# EAGLE board 2015Xover (EAGLE 7.6.0)
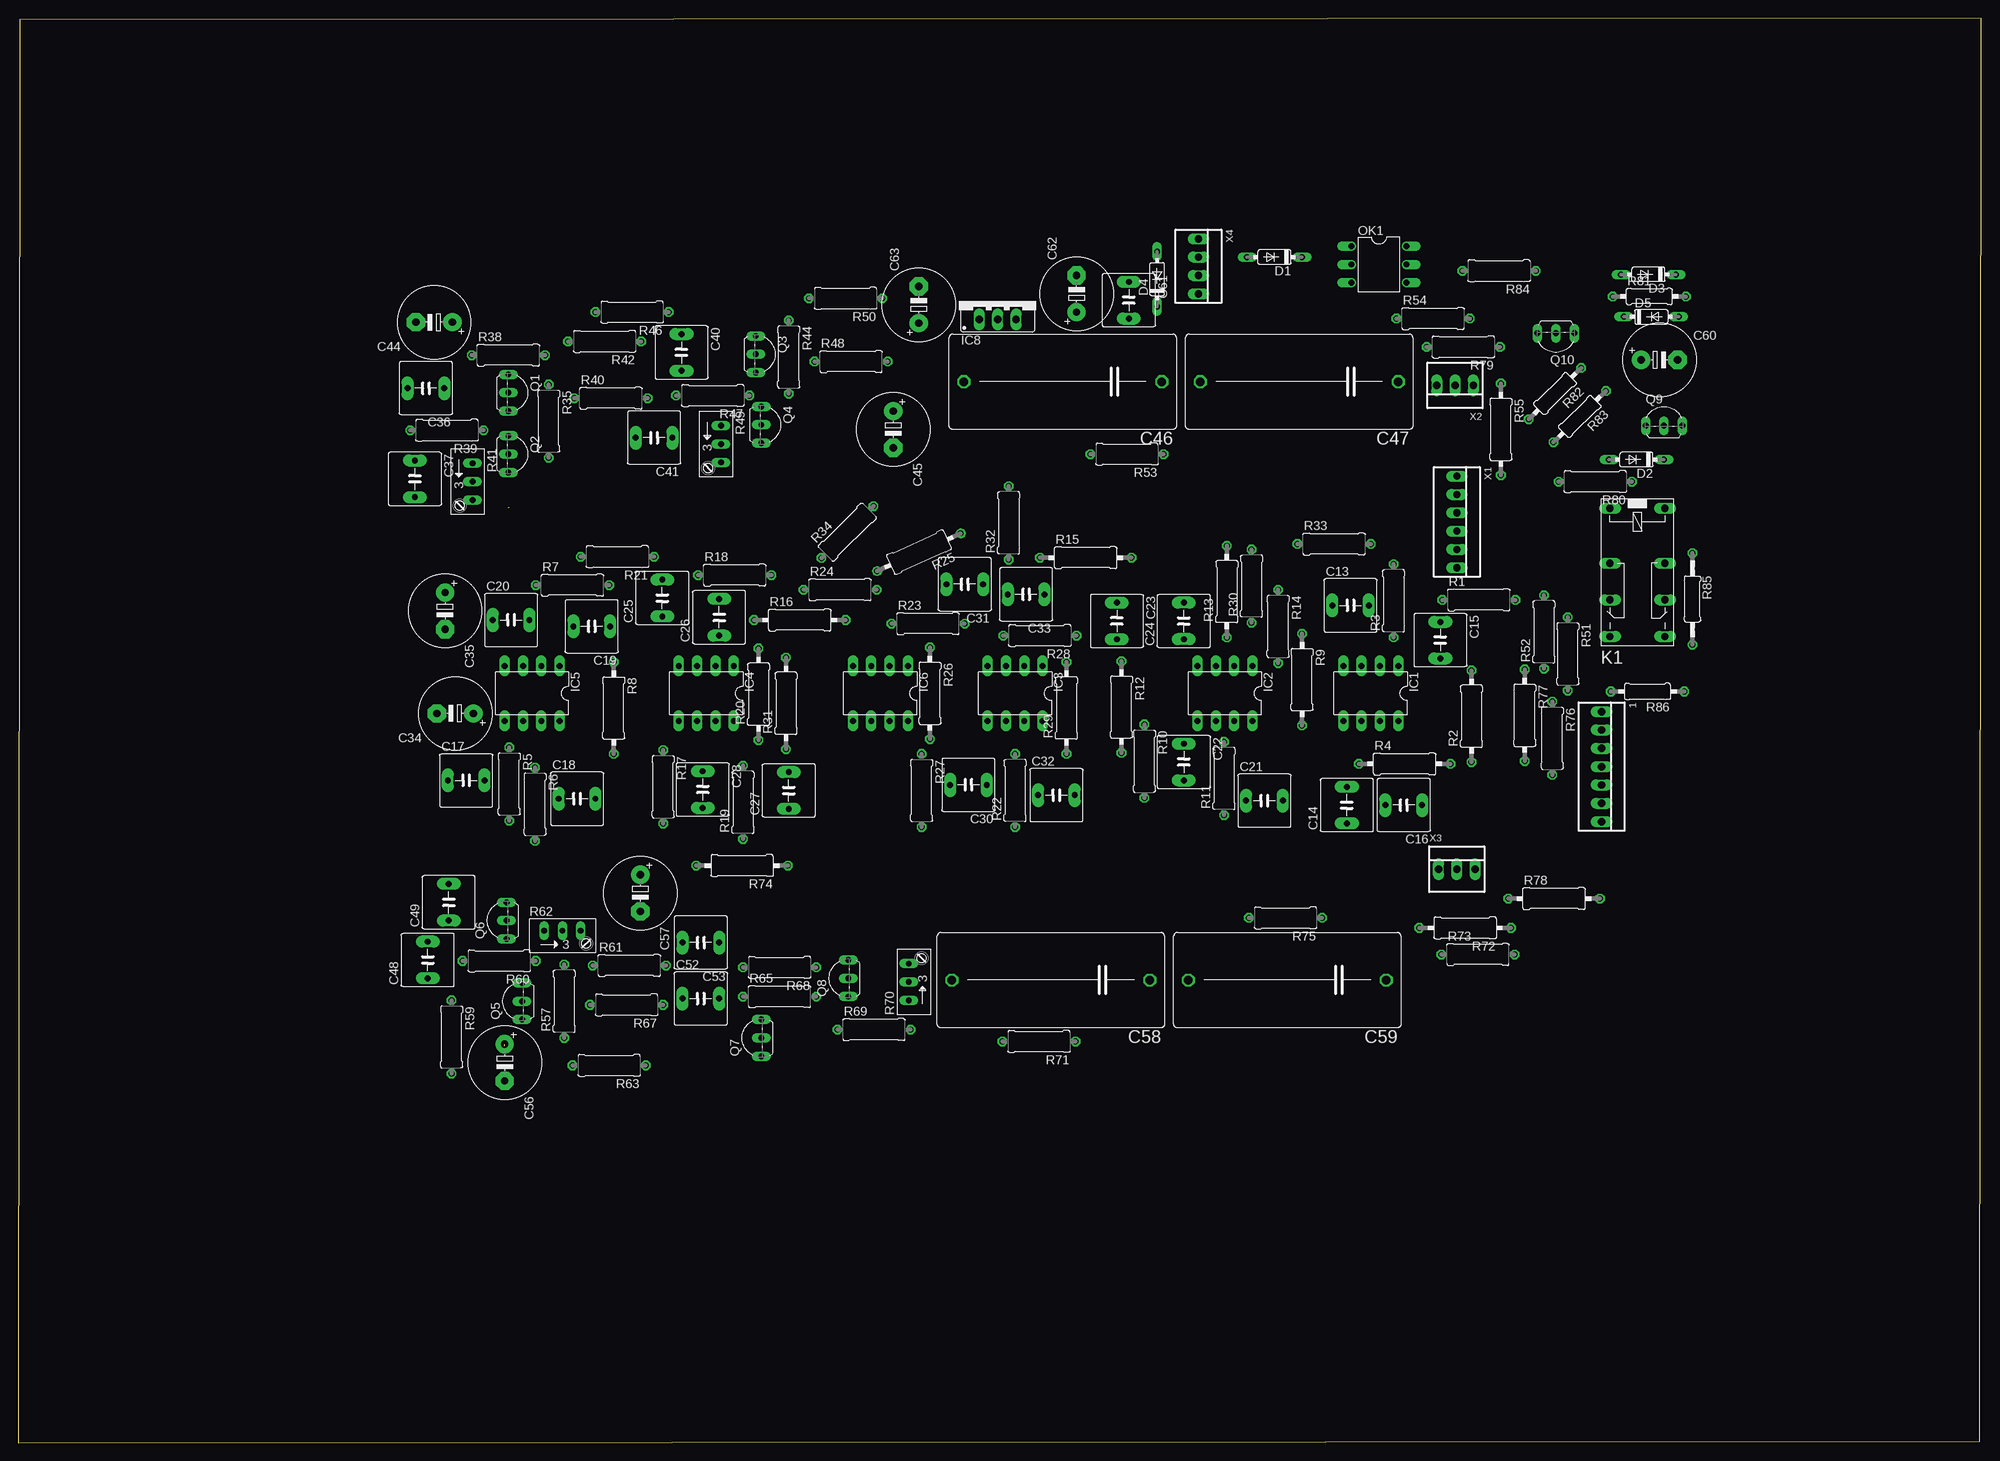
[diagram p0: board, top side]
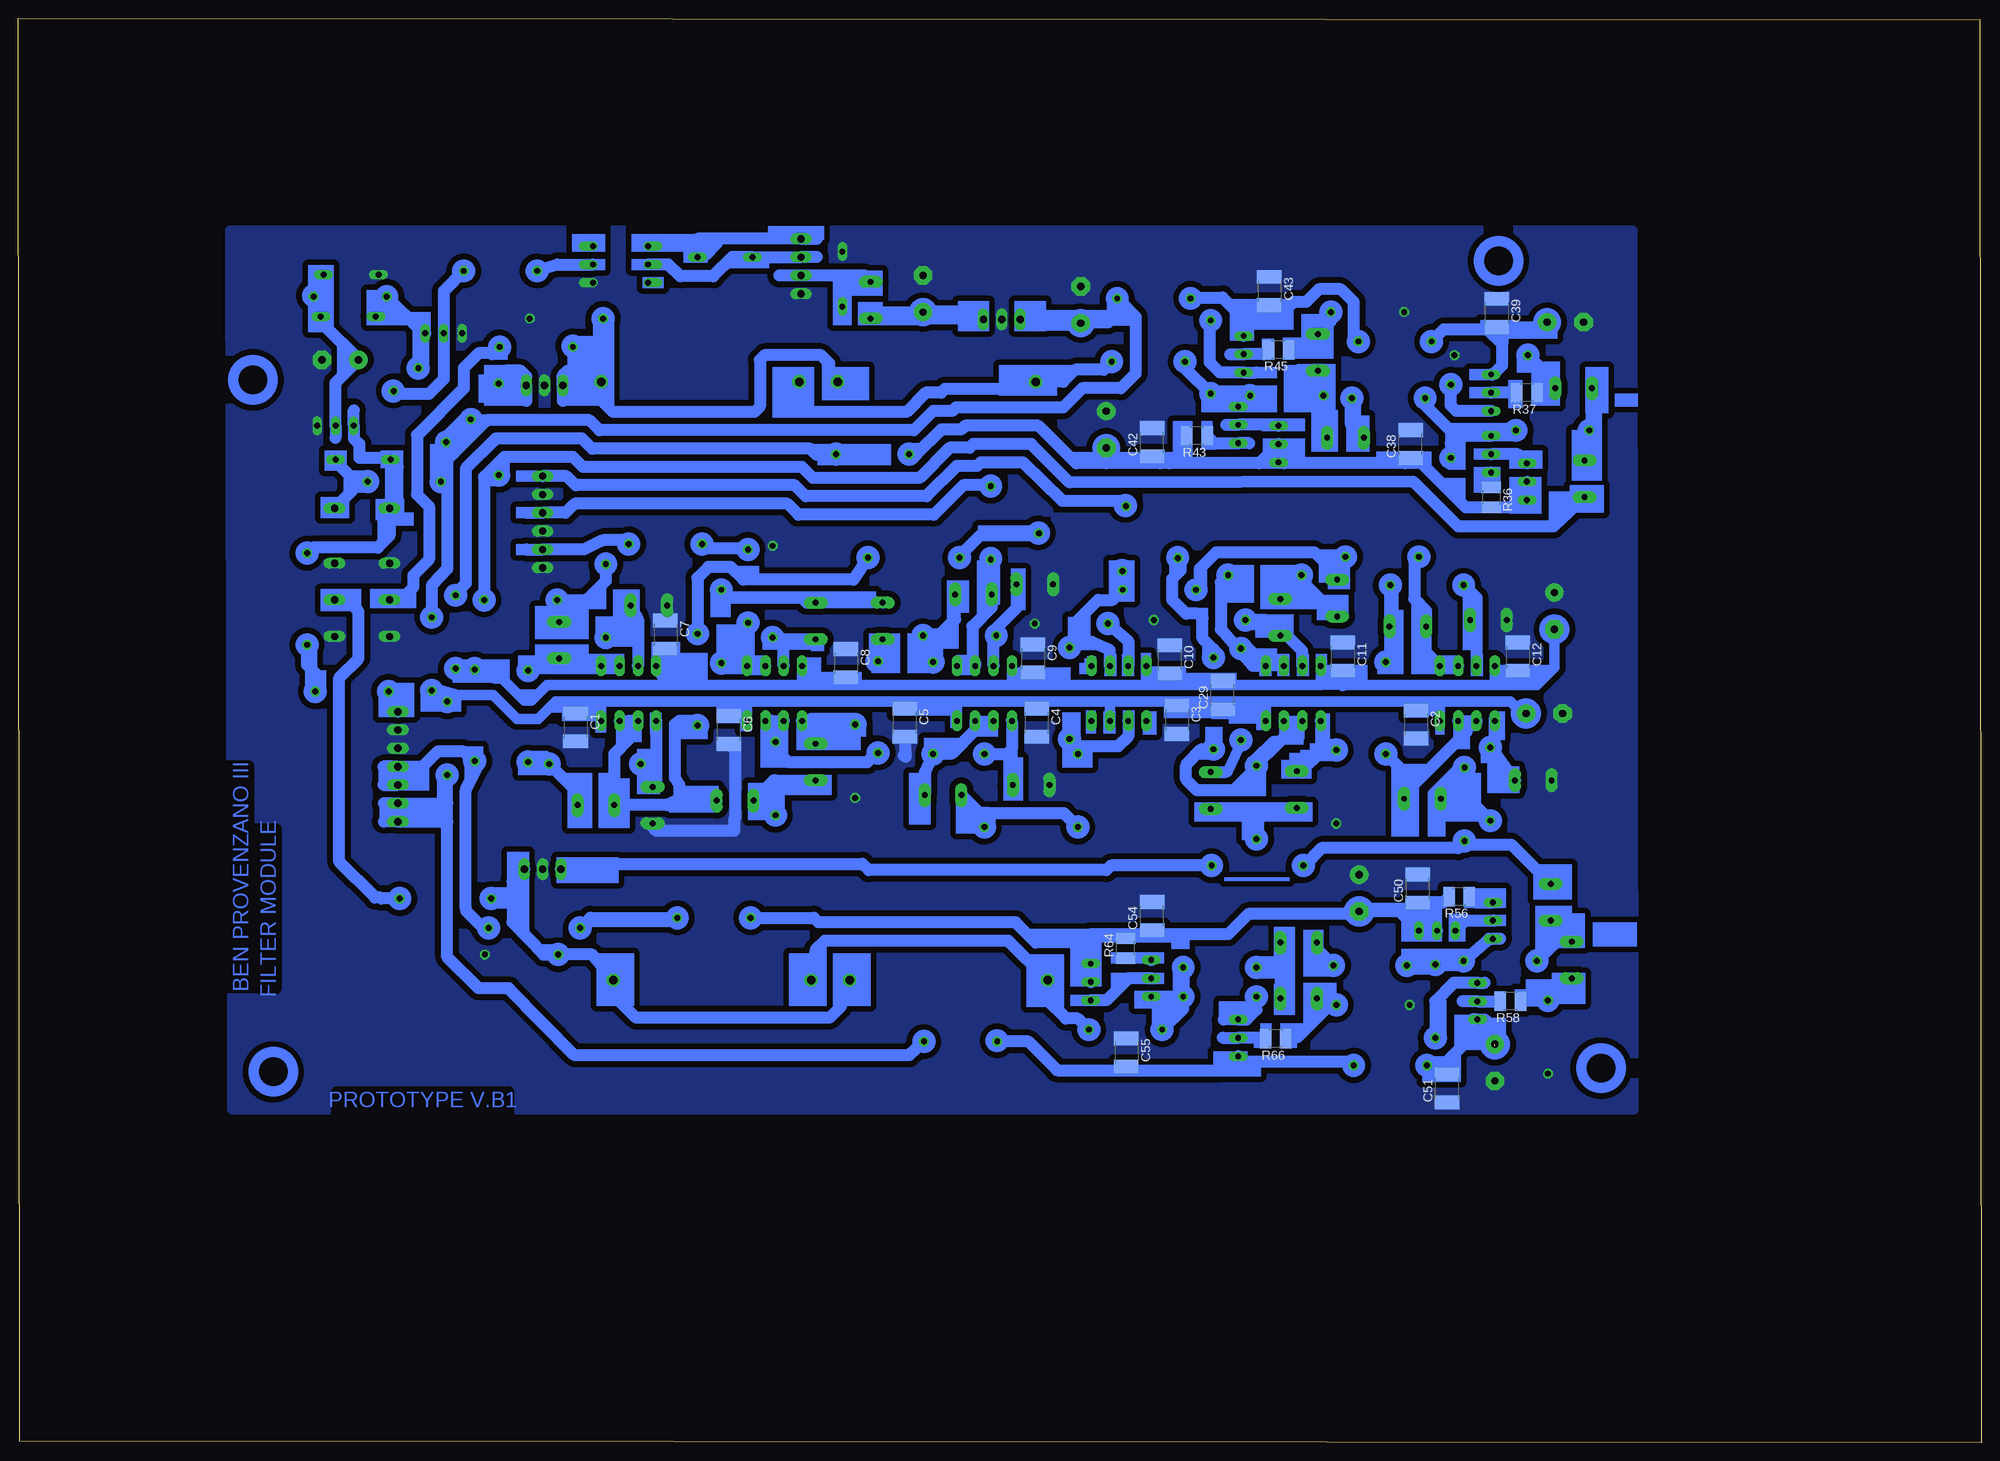
[diagram p1: board, bottom side, seen from below]

Size 272.08 x 197.47 mm. Coordinates in mm from the lower left corner, seen from the top.
Outline: 0,0 271.83,0.25 272.08,197.47 0.25,197.22 0,0
Copper layers (1*16): Top 0.035mm / dielectric 1.5mm / Bottom 0.035mm
Design rules "default": minimum track width 10mil, minimum drill 24mil, track to track 8mil, track to pad 8mil, pad to pad 8mil, via to via 8mil, smd to smd 8mil, copper to edge 40mil, drill to drill 8mil, minimum pad ring 10mil, minimum via ring 8mil, stop-mask expansion 5mil, vias tented up to drill 0mil, thermal gap 10mil

## Footprints (pad centres in the part's own frame; a part is rotated, then mirrored left to right if it is on the bottom)
22-23-2071 = drill 1 long: 1 -7.62,0; 2 -5.08,0; 3 -2.54,0; 4 0,0; 5 2.54,0; 6 5.08,0; 7 7.62,0
C4532 = smd 1.9 x 3.4: 1 -1.95,0; 2 1.95,0
C050-075X075 = drill 0.813 pad 1.676 long: 1 -2.54,0; 2 2.54,0
E5-10,5 = drill 1.016 pad 2.54: + -2.54,0 | drill 1.016 pad 2.54 octagon: - 2.54,0
C275-134X316 = drill 1.194 octagon: 1 -13.716,0; 2 13.716,0
DO35-7 = drill 0.813 long: A 3.81,0; C -3.81,0
DIL08 = drill 0.813 pad 1.422 long: 1 -3.81,-3.81; 2 -1.27,-3.81; 3 1.27,-3.81; 4 3.81,-3.81; 5 3.81,3.81; 6 1.27,3.81; 7 -1.27,3.81; 8 -3.81,3.81
78XXS = drill 1.016 long: GND 0,-2.54; IN -2.54,-2.54; OUT 2.54,-2.54
351 = drill 1.016 long: 1 -3.81,-3.81; 16 -3.81,3.81; O1 8.89,-3.81; O2 8.89,3.81; P1 3.81,-3.81; P2 3.81,3.81; S1 13.97,-3.81; S2 13.97,3.81
DIL06 = drill 0.813 offset: 1 -2.54,-3.81; 2 0,-3.81; 3 2.54,-3.81; 4 2.54,3.81; 5 0,3.81; 6 -2.54,3.81
TO92-EBC = drill 0.813 long: B 0,-1.27; C -2.54,-1.27; E 2.54,-1.27
0309/10 = drill 0.813 octagon: 1 -5.08,0; 2 5.08,0
0309/12 = drill 0.813 octagon: 1 -6.35,0; 2 6.35,0
R1210 = smd 1.6 x 2.7: 1 -1.4,0; 2 1.4,0
RJ9W = drill 0.813 long: A 2.54,0.635; E -2.54,0.635; S 0,0.635
0207/10 = drill 0.813 octagon: 1 -5.08,0; 2 5.08,0
0207/12 = drill 0.813 octagon: 1 -6.35,0; 2 6.35,0
22-23-2061 = drill 1 long: 1 -6.35,0; 2 -3.81,0; 3 -1.27,0; 4 1.27,0; 5 3.81,0; 6 6.35,0
22-23-2031 = drill 1 long: 1 -2.54,0; 2 0,0; 3 2.54,0
22-23-2041 = drill 1 long: 1 -3.81,0; 2 -1.27,0; 3 1.27,0; 4 3.81,0

## Placement (x,y rotation side)
1  PWR  [22-23-2071]  219.46,93.73 270 top
C1  .1  [C4532]  194.82,99.19 270 bottom
C2  .1  [C4532]  78.36,99.57 270 bottom
C3  .1  [C4532]  111.51,100.2 270 bottom
C4  .1  [C4532]  130.94,99.82 270 bottom
C5  .1  [C4532]  149.22,99.82 270 bottom
C6  .1  [C4532]  173.61,98.81 270 bottom
C7  .1  [C4532]  182.37,112.01 270 bottom
C8  .1  [C4532]  157.35,108.08 270 bottom
C9  .1  [C4532]  131.44,108.71 270 bottom
C10  .1  [C4532]  112.52,108.58 270 bottom
C11  .1  [C4532]  88.52,108.97 270 bottom
C12  .1  [C4532]  64.26,108.97 270 bottom
C13  33nF  [C050-075X075]  184.66,116.08 0 top
C14  33nF  [C050-075X075]  184.15,88.39 90 top
C15  2x33nF  [C050-075X075]  197.1,111.25 270 top
C16  2x33nF  [C050-075X075]  192.02,88.39 180 top
C17  33nF  [C050-075X075]  62.1,91.82 0 top
C18  2x33nF  [C050-075X075]  77.47,89.28 0 top
C19  2x33nF  [C050-075X075]  79.5,113.16 180 top
C20  33nF  [C050-075X075]  68.33,114.05 0 top
C21  100nF  [C050-075X075]  172.72,89.03 0 top
C22  100nF  [C050-075X075]  161.54,94.36 270 top
C23  100nF  [C050-075X075]  152.27,113.92 270 top
C24  100nF  [C050-075X075]  161.54,113.92 90 top
C25  100nF  [C050-075X075]  89.28,117.09 90 top
C26  100nF  [C050-075X075]  97.16,114.43 90 top
C27  100nF  [C050-075X075]  106.81,90.42 90 top
C28  100nF  [C050-075X075]  94.87,90.55 270 top
C29  .1  [C4532]  105.16,103.63 90 bottom
C30  100nF  [C050-075X075]  131.7,91.19 180 top
C31  100nF  [C050-075X075]  131.19,119 180 top
C32  2x100nF  [C050-075X075]  143.89,89.79 0 top
C33  2x100nF  [C050-075X075]  139.7,117.6 180 top
C34  100uF  [E5-10,5]  60.58,101.09 180 top
C35  100uF  [E5-10,5]  59.18,115.32 270 top
C36  33nF  [C050-075X075]  56.52,146.18 180 top
C37  33nF  [C050-075X075]  54.99,133.6 270 top
C38  .1  [C4532]  79.12,138.43 90 bottom
C39  .1  [C4532]  67.18,156.59 270 bottom
C40  33nF  [C050-075X075]  91.95,151.13 270 top
C41  33nF  [C050-075X075]  88.14,139.32 180 top
C42  .1  [C4532]  114.94,138.68 90 bottom
C43  .1  [C4532]  98.68,159.64 270 bottom
C44  100uF  [E5-10,5]  57.66,155.32 180 top
C45  100uF  [E5-10,5]  121.28,140.46 270 top
C46  3u3  [C275-134X316]  144.78,147.07 180 top
C47  1uF  [C275-134X316]  177.55,147.07 180 top
C48  33nF  [C050-075X075]  56.77,66.93 90 top
C49  33nF  [C050-075X075]  59.69,74.93 90 top
C50  .1  [C4532]  78.11,76.84 90 bottom
C51  .1  [C4532]  74.04,49.15 90 bottom
C52  33nF  [C050-075X075]  94.62,61.59 0 top
C53  33nF  [C050-075X075]  94.62,69.34 180 top
C54  .1  [C4532]  114.94,73.03 90 bottom
C55  .1  [C4532]  118.49,54.1 270 bottom
C56  100uF  [E5-10,5]  67.44,52.7 270 top
C57  100uF  [E5-10,5]  86.23,76.2 270 top
C58  3u3  [C275-134X316]  143.13,64.13 180 top
C59  1uF  [C275-134X316]  175.89,64.13 180 top
C60  100uF  [E5-10,5]  227.46,150.11 0 top
C61  .5APTC  [C050-075X075]  153.92,158.37 270 top
C62  100uF  [E5-10,5]  146.69,159.26 90 top
C63  47uF  [E5-10,5]  124.84,157.73 90 top
D1  4148  [DO35-7]  174.12,164.34 180 top
D2  4007  [DO35-7]  224.28,136.27 180 top
D3  15v  [DO35-7]  225.93,161.93 180 top
D4  15V  [DO35-7]  157.86,161.29 90 top
D5  4148  [DO35-7]  226.31,156.08 0 top
IC1  OPA2134P  [DIL08]  187.45,103.89 180 top
IC2  OPA2134P  [DIL08]  167.26,103.89 180 top
IC3  OPA2134P  [DIL08]  138.18,103.89 180 top
IC4  OPA2134P  [DIL08]  95.38,103.89 180 top
IC5  OPA2134P  [DIL08]  71.25,103.89 180 top
IC6  OPA134S  [DIL08]  119.51,103.89 180 top
IC8  [78XXS]  135.76,158.24 0 top
K1  351  [351]  224.41,125.73 270 top
OK1  4N28  [DIL06]  188.59,163.32 270 top
Q1  K170  [TO92-EBC]  69.22,145.54 270 top
Q2  J112  [TO92-EBC]  69.22,137.03 270 top
Q3  K170  [TO92-EBC]  103.5,150.88 270 top
Q4  J112  [TO92-EBC]  104.27,141.1 270 top
Q5  K170  [TO92-EBC]  68.58,61.21 90 top
Q6  J112  [TO92-EBC]  66.42,72.39 90 top
Q7  K170  [TO92-EBC]  101.73,56.13 90 top
Q8  J112  [TO92-EBC]  113.79,64.39 90 top
Q9  2106  [TO92-EBC]  228.09,142.24 0 top
Q10  BC546  [TO92-EBC]  213.11,152.53 180 top
R1  15K  [0309/10]  202.44,116.84 0 top
R2  15k  [0309/12]  201.42,100.71 90 top
R3  15k  [0309/10]  190.63,116.71 90 top
R4  15k  [0309/12]  192.15,94.11 0 top
R5  15k  [0309/10]  68.07,91.31 270 top
R6  15k  [0309/10]  71.63,88.52 270 top
R7  15k  [0309/10]  76.83,118.87 0 top
R8  15k  [0309/12]  82.55,101.85 270 top
R9  0  [0309/12]  177.93,105.79 270 top
R10  50K  [0309/10]  156.08,94.49 270 top
R11  25K  [0309/10]  167.13,92.07 90 top
R12  0  [0309/12]  152.91,101.98 270 top
R13  50K  [0309/12]  167.51,117.98 90 top
R14  25K  [0309/10]  174.62,113.16 270 top
R15  0  [0309/12]  147.95,122.68 0 top
R16  50K  [0309/12]  108.33,114.05 0 top
R17  50K  [0309/10]  89.41,90.93 270 top
R18  25K  [0309/10]  99.31,120.27 0 top
R19  25K  [0309/10]  100.46,88.77 90 top
R20  0  [0309/12]  102.62,103.76 90 top
R21  0  [0309/10]  83.06,122.81 180 top
R22  25K  [0309/10]  138.18,90.42 90 top
R23  1K  [0309/10]  126.11,113.54 0 top
R24  10K  [0309/10]  113.92,118.24 0 top
R25  10K  [0309/12]  124.84,123.44 204.3 top
R26  10K  [0309/12]  126.36,103.89 270 top
R27  25K  [0309/10]  125.22,90.42 270 top
R28  25K  [0309/10]  141.61,111.89 180 top
R29  25K  [0309/12]  145.29,101.85 90 top
R30  118  [0309/10]  170.94,118.75 90 top
R31  118  [0309/12]  106.43,102.49 90 top
R32  118  [0309/10]  137.29,127.51 90 top
R33  NA  [0309/10]  182.37,124.59 0 top
R34  NA  [0309/10]  114.94,126.24 45 top
R35  5R1  [0309/10]  73.53,141.61 270 top
R36  1K1  [R1210]  67.94,131.06 270 bottom
R37  1K1  [R1210]  62.99,145.54 180 bottom
R38  30K  [0309/10]  67.94,150.75 0 top
R39  15k  [0309/10]  59.44,140.33 180 top
R40  118  [0309/10]  82.17,144.78 0 top
R41  [RJ9W]  62.36,133.22 270 top
R42  0  [0309/10]  81.28,152.65 180 top
R43  1K1  [R1210]  108.71,139.57 180 bottom
R44  5R1  [0309/10]  106.81,150.5 270 top
R45  1K1  [R1210]  97.41,151.51 180 bottom
R46  30K  [0309/10]  85.09,156.72 180 top
R47  15k  [0309/10]  96.27,145.16 180 top
R48  118  [0309/10]  115.44,149.86 0 top
R49  [RJ9W]  96.77,138.43 270 top
R50  5R1  [0309/10]  114.68,158.62 180 top
R51  0  [0309/10]  214.76,109.35 270 top
R52  0  [0309/10]  211.45,112.39 90 top
R53  5R1  [0309/10]  153.67,137.03 180 top
R54  100K  [0309/10]  196.09,155.83 0 top
R55  NA  [0309/12]  205.49,140.46 270 top
R56  1K1  [R1210]  72.39,75.69 180 bottom
R57  5R1  [0309/10]  75.69,61.21 90 top
R58  1K1  [R1210]  65.28,61.21 180 bottom
R59  30K  [0309/10]  60.07,56.26 270 top
R60  15k  [0309/10]  66.67,66.8 180 top
R61  118  [0309/10]  84.71,66.17 0 top
R62  [RJ9W]  75.44,70.36 0 top
R63  0  [0309/10]  81.91,52.32 180 top
R64  1K1  [R1210]  118.62,68.58 90 bottom
R65  5R1  [0309/10]  105.54,61.85 0 top
R66  1K1  [R1210]  97.79,56.01 180 bottom
R67  30K  [0309/10]  84.33,60.71 180 top
R68  15k  [0309/10]  105.54,65.91 180 top
R69  118  [0309/10]  118.62,57.28 0 top
R70  [RJ9W]  124.08,63.88 90 top
R71  5R1  [0309/10]  141.48,55.63 180 top
R72  0  [0309/12]  200.53,71.37 180 top
R73  100K  [0309/10]  202.31,67.69 0 top
R74  NA  [0309/12]  100.33,80.01 180 top
R75  5R1  [0309/10]  175.64,72.77 180 top
R76  0V+  [0309/10]  212.6,97.66 270 top
R77  0V-  [0309/12]  208.79,100.84 270 top
R78  0  [0309/12]  212.85,75.44 0 top
R79  0  [0309/10]  200.28,151.89 180 top
R80  220  [0309/10]  218.57,133.22 180 top
R81  2M2  [0207/10]  226.06,158.88 0 top
R82  10K  [0207/10]  212.98,145.41 224.4 top
R83  10K  [0207/10]  216.41,142.24 224.3 top
R84  0  [0309/10]  205.23,162.43 180 top
R85  0  [0207/12]  232.03,116.97 270 top
R86  0  [0207/10]  225.81,104.14 180 top
X1  LPF  [22-23-2061]  199.39,127.63 270 top
X2  IO  [22-23-2031]  199.14,146.56 180 top
X3  IO  [22-23-2031]  199.39,79.5 0 top
X4  KK  [22-23-2041]  163.58,163.07 270 top

## Library data of the parts
1 = con-molex; MF: MOLEX; MPN: 22-23-2071; OC_FARNELL: 1654534; OC_NEWARK: 56H0445
C1-C63 R1-R40 R42-R48 R50-R61 R63-R69 R71-R86 = resistor
D1-D5 = diode
IC1-IC6 = linear
IC8 = v-reg
K1 = relay; OC_FARNELL: unknown; OC_NEWARK: unknown
OK1 = optocoupler; MF: FAIRCHILD SEMICONDUCTOR; MPN: 4N35; OC_FARNELL: 1328375; OC_NEWARK: 72K9946
Q1-Q10 = transistor-npn
R41 R49 R62 R70 = pot
X1 = con-molex; MF: MOLEX; MPN: 22-23-2061; OC_FARNELL: 1462922; OC_NEWARK: 27C1933
X2 X3 = con-molex; MF: MOLEX; MPN: 22-23-2031; OC_FARNELL: 1462950; OC_NEWARK: 30C0862
X4 = con-molex; MF: MOLEX; MPN: 22-23-2041; OC_FARNELL: 1462920; OC_NEWARK: 38C0355

## Nets
+15V: C1.1 C2.1 C3.1 C4.1 C5.1 C6.1 C29.1 C34.+ IC1.8 IC2.8 IC3.8 IC4.8 IC5.8 IC6.7 R51.2 R76.1
-15V: C7.2 C8.2 C9.2 C10.2 C11.2 C12.2 C29.2 C35.- IC1.4 IC2.4 IC3.4 IC4.4 IC5.4 IC6.4 R52.1 R77.1
GND: 1.2 1.3 C1.2 C2.2 C3.2 C4.2 C5.2 C6.2 C7.1 C8.1 C9.1 C10.1 C11.1 C12.1 C13.1 C14.1 C17.1 C20.1 C30.2 C31.2 C34.- C35.+ C38.2 C39.1 C42.2 C43.1 C44.- C45.+ C50.2 C51.1 C54.2 C55.1 C56.- C57.+ C60.- C62.- C63.- D3.A D4.A IC8.GND K1.P1 K1.P2 K1.S1 K1.S2 OK1.4 Q9.E Q10.E R10.2 R13.2 R16.2 R17.2 R23.2 R38.2 R46.2 R54.2 R59.2 R67.2 R73.2 X1.2 X1.4 X1.6 X2.2 X3.2 X4.4
N$1: C15.2 IC1.1 IC1.2 R2.2
N$2: C23.1 C24.2 R14.1
N$3: IC2.1 IC2.2 R14.2 R30.1
N$4: IC2.6 IC2.7 R11.2 R12.2
N$5: C33.2 IC3.1 IC3.2 R32.1
N$6: C32.2 IC3.6 IC3.7 R29.1
N$7: Q2.E R36.1
N$8: IC4.6 IC4.7 R19.2 R31.1
N$9: C18.2 IC5.6 IC5.7 R8.2
N$10: C19.2 IC5.1 IC5.2 R21.2
N$11: C16.1 R2.1 R4.2
N$12: C15.1 R1.1 R3.2
N$13: C13.2 IC1.3 R3.1
N$14: C14.2 IC1.5 R4.1
N$16: C18.1 R5.2 R6.1
N$17: C17.2 IC5.5 R5.1
N$18: C20.2 IC5.3 R7.1
N$19: C19.1 R7.2 R8.1
N$20: C21.1 C22.2 R11.1
N$21: C22.1 IC2.5 R10.1
N$22: C16.2 C21.2 IC1.6 IC1.7 R9.2
N$23: C24.1 IC2.3 R13.1
N$24: C23.2 R12.1
N$25: R9.1 R15.2
N$26: C27.2 R20.1
N$27: C27.1 C28.2 R19.1
N$28: C28.1 IC4.5 R17.1
N$29: C26.1 IC4.3 R16.1
N$30: C25.1 C26.2 R18.1
N$31: R30.2 R33.1
N$32: R31.2 R34.1
N$33: Q2.C R35.2 R39.1 R40.1
N$34: IC4.1 IC4.2 R18.2 R20.2
N$35: Q1.E R35.1
N$36: C49.2 R6.2 R74.2
N$37: C39.2 C44.+ Q1.C R42.2
N$38: IC6.2 R24.2 R25.2 R26.1
N$39: IC6.6 R26.2 R27.1
N$40: C25.2 R21.1 R24.1
N$41: R15.1 R25.1
N$42: Q1.B R37.2
N$43: C31.1 IC3.3 R28.2
N$44: C30.1 IC3.5 R22.2
N$45: C32.1 R22.1 R27.2
N$46: C33.1 R28.1 R29.2
N$47: Q2.B R41.E
N$48: C36.1 R37.1 R38.1
N$49: R34.2 X1.1
N$50: R32.2 X1.3
N$51: R33.2 X1.5
N$52: C36.2 C37.1 R39.2
N$53: C37.2 R1.2 R55.2
N$54: C41.2 R40.2
N$55: IC6.3 R23.1
N$56: C38.1 C42.1 C45.- R36.2 R41.A R41.S R43.2 R49.A R49.S R53.2
N$57: Q4.E R43.1
N$58: Q4.C R44.2 R47.1 R48.1
N$59: Q3.E R44.1
N$60: C43.2 Q3.C R42.1 R50.2
N$61: Q3.B R45.2
N$62: Q4.B R49.E
N$63: C40.1 R45.1 R46.1
N$64: C40.2 C41.1 R47.2
N$65: R52.2 R53.1
N$66: OK1.5 R84.2
N$67: C46.2 C47.2 R48.2
N$68: C46.1 C47.1 R54.1 R79.2 X2.3
N$69: R55.1 X2.1
N$70: 1.6 1.7 R71.1 R76.2
N$71: Q6.E R56.1
N$72: Q6.C R57.2 R60.1 R61.1
N$73: Q5.E R57.1
N$74: C51.2 C56.+ Q5.C R63.2
N$75: Q5.B R58.2
N$76: Q6.B R62.E
N$77: C48.1 R58.1 R59.1
N$78: C48.2 C49.1 R60.2
N$79: C50.1 C54.1 C57.- R56.2 R62.A R62.S R64.2 R70.A R70.S R75.2
N$80: C53.2 R61.2
N$81: Q8.E R64.1
N$82: Q8.C R65.2 R68.1 R69.1
N$83: Q7.E R65.1
N$84: C55.2 Q7.C R63.1 R71.2
N$85: Q7.B R66.2
N$86: Q8.B R70.E
N$87: C52.1 R66.1 R67.1
N$88: C52.2 C53.1 R68.2
N$89: D1.C OK1.1 X4.1
N$90: R72.2 R75.1
N$91: C58.2 C59.2 R69.2
N$92: C58.1 C59.1 R73.1 R78.1 X3.3
N$93: R74.1 X3.1
N$94: 1.4 1.5 R72.1 R77.2
N$95: D1.A OK1.2 X4.2
N$96: K1.O1 R79.1
N$97: D2.C K1.16 R80.1
N$98: C60.+ D3.C D5.A Q9.B R81.2
N$99: K1.O2 R78.2
N$100: D2.A K1.1 Q9.C R85.1
N$101: C61.1 D4.C X4.3
N$102: C61.2 C62.+ IC8.OUT
N$103: D5.C Q10.C R81.1 R82.1
N$104: Q10.B R83.1 R84.1
N$105: C63.+ IC8.IN R50.1 R51.1 R80.2 R82.2 R83.2
N$106: R85.2 R86.1
N$107: 1.1 R86.2

## Tracks (layer width: path | path; a pad name or v marks a point on that pad's centre or on a via)
+15V
  Bottom 1.422: IC5.8 75.06,102.74 | 78.11,102.74 99.19,102.74 | 106.81,102.74 120.78,102.74 | 120.78,102.74 130.94,102.74 | 130.94,102.74 141.99,102.74 | 141.99,102.74 145.67,102.74 | 145.67,102.74 171.07,102.74 | 171.07,102.74 173.61,102.74 | 191.26,102.74 IC1.8 | IC4.8 99.19,102.74 | IC6.7 120.78,102.74 | IC3.8 141.99,102.74 | IC2.8 171.07,102.74 | C6.1 173.61,102.74 | C5.1 144.65,102.62 145.67,102.74 | 194.18,101.73 192.66,102.74 | 192.66,102.74 192.53,102.74 | 192.53,102.74 191.26,102.74 | C4.1 130.94,102.74 | C2.1 78.11,102.74 | C3.1 111.63,102.5 106.81,102.74 | 106.81,102.74 99.19,102.74 | 173.61,102.74 191.26,102.74 | 192.53,102.74 194.18,101.85 194.18,101.73 | 194.18,101.73 C1.1 | 192.66,102.74 197.61,102.74 200.02,100.33 202.95,100.33 206.25,103.63 211.2,103.63 212.59,104.04 | 78.11,102.74 75.06,102.74 | 75.06,102.74 65.28,102.74 63.63,101.09 C34.+ | 212.59,104.04 213.36,104.27 R51.2 | R76.1 212.59,104.04
  Bottom 1.676: C29.1 104.82,102.11 106.68,102.11 107.06,102.49 111.63,102.5
-15V
  Bottom 1.422: 180.97,105.03 182.12,105.03 IC1.4 182.63,107.7 182.63,105.03 198.75,105.03 200.91,102.87 201.93,102.87 204.98,105.92 205.99,105.92 | 180.97,105.03 163.45,105.03 | 163.45,105.03 159,105.03 | 159,105.03 134.37,105.03 | 134.37,105.03 131.19,105.03 | 131.19,105.03 115.7,105.03 | 115.7,105.03 112.9,105.03 | 112.9,105.03 91.57,105.03 91.57,105.16 IC4.4 | 67.44,105.03 88.52,105.03 C11.2 | 67.44,105.16 67.44,105.03 | IC6.4 115.7,105.03 | IC3.4 134.37,105.03 | IC2.4 163.45,105.03 | C12.2 65.58,107.02 67.44,105.16 | C10.2 112.65,105.66 112.65,105.28 112.9,105.03 | C9.2 131.44,105.41 131.19,105.03 | C8.2 156.97,105.16 159,105.03 | C7.2 180.97,105.03 | C35.- 59.18,107.44 61.59,105.03 67.44,105.03 | 67.44,105.16 IC5.4 | 205.99,105.92 210.19,106.68 R52.1 | 206.5,106.43 205.99,105.92
  Bottom 1.676: C29.2 104.44,105.54 113.41,105.54 113.28,105.66 112.65,105.66 | 88.52,105.03 88.65,105.16 91.57,105.16 | R77.1 208.92,107.31 208.79,107.44 209.68,107.44 | 209.68,107.44 209.42,106.68 | 210.19,106.68 209.68,107.44
GND
  Bottom 1.676: C6.2 172.72,95.97 172.72,86.61 172.85,86.49 172.85,84.84 183.64,84.84 184.28,85.47 184.28,85.72 | C5.2 149.1,95.12 149.35,95.25
  pour Bottom (isolate 0.813, no thermals): 48.39,168.02 48.26,46.23 242.44,46.23 242.7,168.02
N$1
  Bottom 1.422: IC1.2 190.75,107.7 IC1.1
  Bottom 1.676: C15.2 196.47,108.08 | 196.09,107.7 190.75,107.7 | R2.2 200.79,107.7 196.09,107.7 | 196.09,107.7 196.47,108.08 | 196.47,108.08 196.72,108.08
N$2
  Bottom 1.676: C23.1 C24.2 162.81,116.46 163.45,117.09 173.36,117.09 174.5,118.24 R14.1 173.99,118.11
N$3
  Bottom 1.676: R14.2 173.36,107.7 IC2.1 | IC2.2 IC2.1 | R30.1 171.07,113.54 IC2.1
N$4
  Bottom 1.422: 168.4,100.08 IC2.7
  Bottom 1.676: R11.2 167.26,97.66 167.64,100.08 | 167.64,100.08 168.4,100.08 167.26,98.93 167.26,96.27 165.35,94.36 154.43,94.36 R12.2 | 167.64,100.08 IC2.6
N$5
  Bottom 1.422: IC3.2 IC3.1
  Bottom 1.676: R32.1 137.29,117.73 C33.2 137.16,115.82 139.83,113.16 139.83,108.46 139.45,108.08 IC3.2
N$6
  Bottom 1.422: IC3.6 IC3.7
  Bottom 1.676: C32.2 146.43,92.96 R29.1 142.75,95.5 139.45,98.81 IC3.7
N$7
  Bottom 1.676: Q2.E R36.1
N$8
  Bottom 1.422: IC4.6 IC4.7
  Bottom 1.676: IC4.7 96.52,99.95 96.52,97.92 97.28,97.16 | 97.28,97.16 100.58,93.85 | 100.58,93.85 R19.2 | 100.58,93.85 100.58,93.47 103.63,90.42 108.71,90.42 110.24,91.95 110.24,93.85 110.11,93.98 110.11,94.11 108.08,96.14 R31.1 | 97.28,97.16 98.04,97.16 100.58,94.61
N$9
  Bottom 1.676: IC5.6 IC5.7 72.39,99.95 71.37,99.95 | 69.98,99.95 71.37,99.95 | 71.37,99.95 71.37,98.55 78.87,91.06 | 78.87,91.06 80.01,89.92 | 80.01,89.92 C18.2 | 80.01,89.92 79.88,89.79 79.88,88.9 | R8.2 78.87,91.82 78.87,91.06
N$10
  Bottom 1.676: IC5.2 IC5.1 76.96,109.6 76.96,112.65 C19.2 | 76.96,113.28 C19.2 | R21.2 78.61,122.17 78.61,116.97 76.96,115.32 C19.2
N$11
  Bottom 1.676: 194.56,87.88 C16.1 194.56,90.17 R4.2 198.75,94.36 R2.1
N$12
  Bottom 1.676: C15.1 193.23,116.9 | 193.23,116.9 190.63,119.51 R3.2 | R1.1 193.36,116.9 193.23,116.9
N$13
  Bottom 1.676: C13.2 186.18,114.17 186.18,111.63 | 186.18,111.63 IC1.3 | R3.1 186.18,111.63
N$14
  Bottom 1.676: IC1.5 183.64,94.11 | 183.64,94.11 183.64,91.31 184.02,90.93 C14.2 184.53,90.93 | R4.1 183.64,94.11
N$15
  Bottom 1.676: 157.35,99.44 159.64,97.03
N$16
  Bottom 1.676: R6.1 72.01,93.85 75.82,90.04 75.82,88.65 75.18,89.28 C18.1 71.12,89.28 R5.2
N$17
  Bottom 1.676: 67.44,100.33 IC5.5 67.44,97.03 R5.1 67.69,96.01 C17.2
N$18
  Bottom 1.676: R7.1 69.98,117.09 69.98,114.17 | 69.98,114.17 IC5.3 | C20.2 70.74,114.17 69.98,114.17
N$19
  Bottom 1.676: R8.1 81.91,108.84 81.91,112.9 81.91,113.03 | 81.91,113.03 R7.2 | C19.1 81.91,113.03
N$20
  Bottom 1.676: C21.1 167.39,91.82 167.13,91.82 | 167.13,91.82 C22.2 | R11.1 167.13,91.82
N$21
  Bottom 1.676: IC2.5 162.31,98.93 161.72,99.32 | 161.72,99.32 161.54,99.44 C22.1 | R10.1 156.08,100.33 162.18,100.33 162.56,99.95 162.56,99.57 162.43,99.44 161.8,99.44 161.78,99.42 | 161.78,99.42 161.78,99.28 | 161.78,99.42 161.72,99.36 161.72,99.32
N$22
  Bottom 1.676: IC1.7 187.45,100.08 | IC1.6 187.45,100.08 | 187.45,100.08 187.45,97.54 189.48,95.5 C16.2 | 189.48,88.14 C16.2 | R9.2 178.56,100.08 180.47,100.08 181.1,99.57 181.1,92.2 180.47,91.19 180.47,89.28 181.36,88.77 | 181.36,88.77 182.12,88.39 C16.2 | C21.2 175.39,88.9 181.36,88.77
N$23
  Bottom 1.676: 162.94,111.38 C24.1 165.99,111.38 | R13.1 167.13,111.38 165.99,111.38 | IC2.3 165.99,111.38
N$24
  Bottom 1.676: C23.2 153.16,109.6 R12.1
N$25
  Bottom 1.676: R9.1 177.93,119.89 176.4,121.41 173.36,121.41 171.58,119.63 156.34,119.63 R15.2
N$26
  Bottom 1.422: 104.9,92.96 104.52,92.96 102.87,96.39 R20.1
  Bottom 1.676: C27.2 104.9,92.96
N$27
  Bottom 1.676: C28.2 95.25,87.88 100.97,87.88 | 100.97,87.88 C27.1 | R19.1 100.97,87.88
N$28
  Bottom 1.676: IC4.5 91.57,95.88 | 91.57,95.88 91.57,95.76 94.23,93.09 C28.1 95.25,93.09 | R17.1 89.53,95.88 91.57,95.88
N$29
  Bottom 1.676: R16.1 99.31,114.05 C26.1 96.27,111.89 94.11,109.73 IC4.3
N$30
  Bottom 1.676: C25.1 94.23,119.51 | 94.23,119.51 R18.1 | C26.2 94.62,119.51 94.23,119.51
N$31
  Bottom 1.676: R30.2 171.07,123.95 176.78,123.95 177.29,124.46 R33.1
N$32
  Bottom 1.676: R31.2 106.43,109.98 107.95,111.51 107.95,114.3 108.59,114.94 110.24,114.94 112.14,116.84 112.14,119.76 111,120.9 111,122.3 R34.1
N$33
  Bottom 1.676: Q2.C 72.39,139.57 73.41,138.56 73.41,136.65 R35.2 73.53,138.56 71.88,140.21 | R39.1 65.28,140.33 65.28,140.21 71.63,140.21 | R40.1 77.09,143.76 73.53,140.21 71.88,140.21 | 71.63,140.21 71.75,140.21 71.88,140.21 | 71.63,140.21 71.5,140.08
N$34
  Bottom 1.422: IC4.1 IC4.2
  Bottom 1.676: IC4.1 99.57,108.08 | 99.57,108.08 101.6,110.11 R20.2 103.25,110.11 | R18.2 105.41,119.25 105.41,112.78 100.97,107.7 99.95,107.7 99.57,108.08
N$35
  Bottom 1.676: Q1.E 72.77,143 73.53,143.76 R35.1
N$36
  Bottom 1.676: C49.2 65.15,82.93 71.25,82.93 71.63,83.31 | 71.63,83.31 R6.2 | 71.63,83.31 72.52,82.42 91.44,82.42 93.85,80.01 R74.2
N$37
  Bottom 1.676: Q1.C 67.69,148.08 66.42,149.35 66.42,152.27 | R42.2 75.06,153.8 | 66.42,152.27 68.45,154.31 | 68.45,154.31 74.55,154.31 R42.2 | 76.33,152.65 R42.2 | C39.2 67.52,154.31 68.45,154.31 | C44.+ 60.96,154.56 67.31,154.56 66.42,153.67 66.42,152.27
N$38
  Bottom 1.676: R26.1 125.09,111.51 | 125.09,111.51 125.09,114.17 122.43,116.84 120.4,116.84 R24.2 119,120.78 R25.2 | IC6.2 120.78,109.86 123.32,111 124.59,111 125.09,111.51
N$39
  Bottom 1.676: IC6.6 118.24,97.92 119.63,96.52 125.48,96.52 | 125.48,96.52 126.36,97.41 R26.2 | R27.1 125.48,95.76 125.48,96.52
N$40
  Bottom 1.676: R21.1 89.28,121.67 | 89.28,121.67 C25.2 | 89.28,121.67 89.41,121.54 89.41,120.4 92.46,123.44 106.05,123.44 108.33,121.16 108.33,118.75 R24.1
N$41
  Bottom 1.676: R25.1 130.94,125.73 138.81,125.73 141.61,122.94 R15.1
N$42
  Bottom 1.676: R37.2 Q1.B
N$43
  Bottom 1.676: C31.1 133.73,115.7 136.53,112.9 R28.2 136.91,111.51 IC3.3
N$44
  Bottom 1.676: IC3.5 134.37,96.14 134.75,95.76 134.75,95.5 | 134.75,95.5 C30.1 134.75,91.06 | R22.2 134.75,95.5
N$45
  Bottom 1.676: C32.1 138.18,86.61 | 138.18,86.61 R22.1 | R27.2 127.13,87.25 137.54,87.25 138.18,86.61
N$46
  Bottom 1.676: R28.1 145.41,111.89 | 144.4,112.01 144.53,111.89 145.41,111.89 | 144.4,112.01 142.24,114.17 C33.1 | R29.2 145.41,111.89 | 144.4,112.01 146.56,112.01 146.81,111.76
N$47
  Bottom 1.676: R41.E 64.26,137.03 Q2.B
N$48
  Bottom 1.676: C36.1 59.69,145.54 60.32,145.54 | 60.32,145.54 R37.1 | R38.1 60.32,148.21 60.32,145.54
N$49
  Bottom 1.676: X1.1 196.09,133.99 194.82,132.72 164.47,132.72 162.94,131.19 146.18,131.19 141.99,135.38 139.19,135.38 138.68,135.89 132.84,135.89 127.38,130.56 123.57,130.56 123.19,130.56 119.25,130.56 R34.2
N$50
  Bottom 1.676: R32.2 137.41,132.72 141.1,132.72 145.16,128.65 163.96,128.65 165.48,130.18 194.94,130.18 196.21,128.91 X1.3 201.68,128.91
N$51
  Bottom 1.676: R33.2 187.96,125.09 191.01,125.09 193.68,123.83 X1.5 201.68,123.83
N$52
  Bottom 1.676: C37.1 53.98,137.16 53.98,140.46 | 53.98,140.46 C36.2 | R39.2 54.1,140.46 53.98,140.46
N$53
  Bottom 1.676: C37.2 59.31,127 72.52,127 78.74,133.22 126.36,133.1 131.7,138.43 139.7,138.43 140.21,137.92 143,137.92 147.19,133.73 161.93,133.73 163.45,135.25 193.8,135.25 195.2,136.65 204.72,136.65 207.52,133.86 | 207.52,133.86 R1.2 | R55.2 205.74,133.86 207.52,133.86
N$54
  Bottom 1.676: C41.2 87.38,141.1 87.38,144.78 R40.2
N$55
  Bottom 1.676: R23.1 118.24,111.12 IC6.3
N$56  (1 unrouted)
  Bottom 1.676: R41.S R41.A 64.01,129.66 R36.2 | 68.07,129.67 71.5,129.67 78.23,136.4 C38.1 79.84,135.76 96.65,135.76 97.03,136.14 97.41,136.14 | 97.41,136.14 R49.S 100.08,135.76 112.52,135.76 | 112.52,135.76 110.11,138.17 R43.2 110.24,139.45 | 112.52,135.76 113.79,135.76 | C42.1 113.79,135.76 | 97.41,136.14 97.54,136.14 | R49.A 97.41,136.14 | 113.79,135.76 121.28,135.76 | 121.28,135.76 125.48,135.76 130.68,140.97 140.84,140.97 141.35,140.46 144.14,140.46 147.57,137.03 R53.2 | C45.- 121.28,135.76
N$57
  Bottom 1.676: R43.1 106.3,138.56 Q4.E 101.47,138.56
N$58
  Bottom 1.676: R47.1 101.6,145.41 103.12,145.41 | 103.12,145.41 R44.2 110.36,148.97 R48.1 | Q4.C 103.12,143.76 103.12,145.41
N$59
  Bottom 1.676: 100.46,148.34 Q3.E 105.54,148.34 106.93,149.73 106.93,155.32 106.81,155.45 | 106.81,155.45 106.81,155.19 | R44.1 106.81,155.45
N$60
  Bottom 1.676: 102.11,155.57 98.63,155.57 C43.2 97.2,156.29 95.38,158.12 93.6,158.12 91.82,159.89 88.77,159.89 87,158.12 87,153.29 R42.1 | 102.11,155.57 102.23,155.57 Q3.C | R50.2 109.47,158.75 105.16,158.75 102.11,155.7 102.11,155.57
N$61
  Bottom 1.676: R45.2 99.44,150.88 Q3.B 104.14,150.88
N$62
  Bottom 1.676: R49.E 97.54,141.1 Q4.B 104.65,141.1
N$63
  Bottom 1.676: R45.1 94.11,151.51 C40.1 90.17,155.45 R46.1
N$64
  Bottom 1.676: C41.1 90.68,144.65 R47.2 91.95,145.92 C40.2
N$65
  Bottom 1.676: R53.1 158.88,136.91 161.42,136.91 162.31,137.8 192.53,137.8 193.93,139.19 205.87,139.19 210.06,135 210.06,119.13 211.33,117.86 211.33,117.6 R52.2
N$66
  Bottom 1.676: R84.2 197.36,163.32 OK1.5
N$67
  Bottom 1.676: R48.2 121.67,148.72 125.6,148.72 127.25,147.07 C46.2 131.19,147.07 132.21,146.05 143.64,146.05 144.14,145.54 146.3,145.54 148.97,142.88 162.69,142.88 163.83,144.02 C47.2
N$68
  Bottom 1.676: C46.1 159.64,148.21 159.64,149.61 160.78,150.75 168.66,150.75 169.29,150.11 169.29,143.64 170.05,142.88 189.61,142.88 191.26,144.53 C47.1 191.26,148.59 | R54.1 191.26,148.59 | 196.6,144.4 X2.3 196.6,147.95 195.96,148.59 195.2,148.59 | 195.2,148.59 191.26,148.59 | R79.2 195.2,148.59
N$69
  Bottom 1.676: 201.68,144.4 X2.1 201.68,147.83 202.44,148.59 204.6,148.59 205.49,147.7 R55.1
N$70
  Bottom 1.676: R71.1 148.59,53.72 194.94,53.72 204.09,62.99 208.28,62.99 212.6,67.31 212.6,86.11 | 212.6,86.11 212.6,88.65 | 212.6,88.65 R76.2 | 221.36,88.65 1.6 212.6,88.65 | 221.36,86.11 1.7 212.6,86.11
N$71
  Bottom 1.676: R56.1 70.23,74.93 Q6.E
N$72
  Bottom 1.676: 66.67,69.85 Q6.C 68.2,69.85 R60.1 | R61.1 79.5,66.29 R57.2 75.18,66.8 R60.1 | 71.88,66.67 R60.1
N$73
  Bottom 1.676: 68.83,63.75 Q5.E 73.15,63.75 75.69,61.21 R57.1
N$74  (1 unrouted)
  Bottom 1.676: 70.61,58.67 Q5.C 68.83,58.67 67.44,57.28 67.44,54.99 67.69,55.24 71.75,55.24 74.8,52.2 | 74.8,52.2 76.71,52.2 R63.2 | C51.2 74.68,51.73 74.68,52.07 74.8,52.2
N$75
  Bottom 1.676: 71.88,61.21 Q5.B R58.2
N$76
  Bottom 1.676: R62.E 71.5,72.39 Q6.B 67.44,72.39
N$77
  Bottom 1.676: C48.1 57.02,64.39 R59.1 63.75,61.34 R58.1
N$78
  Bottom 1.676: R60.2 57.28,71.12 C49.1 | 57.28,72.52 C49.1 | C48.2 C49.1
N$79
  Bottom 1.676: R56.2 74.6,74.88 C50.1 76.71,73.49 76.71,70.99 | 76.71,70.99 R62.A 80.64,73.66 C57.- 86.61,73.28 101.6,73.28 104.39,70.48 115.53,70.48 | R62.S 76.71,70.99 | 118.49,70.48 123.44,70.48 | R70.S R70.A 123.44,70.48 | C54.1 115.53,70.48 | 115.53,70.48 118.49,70.48 | R64.2 118.49,70.11 118.49,70.48 | 123.44,70.48 123.19,70.23 123.19,68.33 123.32,68.45 125.48,68.45 125.48,69.34 131.06,69.34 133.86,72.14 161.16,72.14 161.8,72.77 R75.2
N$80
  Bottom 1.676: R61.2 92.07,68.45 C53.2
N$81
  Bottom 1.676: Q8.E 115.32,67.18 R64.1
N$82
  Bottom 1.676: R68.1 R65.2 | Q8.C R65.2 | R69.1 110.62,60.2 R65.2
N$83
  Bottom 1.676: 105.03,58.67 Q7.E 101.85,58.67 100.46,60.07 R65.1
N$84
  Bottom 1.676: R63.1 87.5,52.83 103,52.83 | 103,52.83 104.65,52.83 105.92,51.56 118.62,51.56 | R71.2 132.08,55.63 128.14,51.69 127.89,51.56 118.62,51.56 | C55.2 118.49,51.69 118.62,51.56 | Q7.C 103,52.83
N$85
  Bottom 1.676: R66.2 99.32,56.13 Q7.B 105.16,56.13
N$86
  Bottom 1.676: Q8.B 118.24,64.39 121.28,61.34 R70.E
N$87
  Bottom 1.676: R67.1 90.3,61.59 90.55,61.59 | 90.55,61.59 C52.1 | R66.1 96.14,56.26 94.74,56.26 90.55,60.45 90.55,61.59
N$88
  Bottom 1.676: C53.1 97.16,65.91 | 97.16,65.91 C52.2 | R68.2 97.16,65.91
N$89
  Bottom 1.676: 161.42,166.88 X4.1 177.93,166.88 178.94,165.86 179.45,165.86 | 179.45,165.86 OK1.1 | D1.C 179.45,165.86
N$90
  Bottom 1.676: R72.2 192.79,72.77 R75.1
N$91
  Bottom 1.676: R69.2 125.22,58.8 126.87,58.8 129.41,61.34 C58.2 134.87,69.6 160.27,69.6 161.54,68.33 C59.2
N$92
  Bottom 1.676: C58.1 157.99,62.99 157.99,60.58 159.64,58.93 186.44,58.93 188.98,61.47 C59.1 192.53,67.69 R73.1 199.26,67.69 203.58,72.14 203.58,75.56 | X3.3 203.58,77.85 203.58,75.56 | R78.1 203.71,75.44 203.58,75.56
N$93
  Bottom 1.676: R74.1 106.81,80.14 106.93,80.01 120.65,80.01 121.28,79.38 154.18,79.38 155.07,80.26 196.09,80.26 X3.1
N$94
  Bottom 1.676: R72.1 207.14,70.87 209.93,73.66 210.06,74.04 210.06,90.42 208.28,94.11 R77.2 209.04,94.49 210.44,95.88 213.87,95.88 215.9,93.85 215.9,93.73 | 215.9,93.73 215.9,92.84 217.55,91.19 1.5 221.49,91.19 | 221.49,93.73 1.4 215.9,93.73
N$95
  Bottom 1.676: D1.A 171.07,164.34 | D1.A 173.1,164.34 175.77,161.67 180.34,161.67 181.99,163.32 OK1.2 | D1.A X4.2 161.42,164.34
N$96
  Bottom 1.676: K1.O1 219.07,116.84 217.3,118.62 217.3,120.27 215.14,122.43 215.14,129.79 216.79,131.44 216.79,139.7 210.31,146.18 210.31,148.97 208.28,151 206.5,151 206.38,150.88 R79.1
N$97
  Bottom 1.676: K1.16 225.81,131.95 225.81,133.1 | 225.81,133.1 225.81,133.73 228.09,136.02 D2.C | R80.1 223.77,133.1 225.81,133.1
N$98
  Bottom 1.676: 229.74,156.21 229.74,154.94 C60.+ 228.09,146.94 Q9.B 228.09,139.32 | 229.74,156.21 229.74,159 | 229.74,159 D3.C | R81.2 230.63,158.88 230.5,159 229.74,159 | D5.A 230.25,156.21 229.74,156.21
N$99
  Bottom 1.676: R78.2 221.74,75.44 221.87,75.56 222.63,75.56 227.58,80.52 227.58,106.04 224.92,108.71 224.92,115.19 226.57,116.84 K1.O2 228.35,116.84
N$100
  Bottom 1.676: 225.55,143.13 Q9.C 225.55,139.19 224.79,138.43 224.79,136.52 220.98,136.52 220.73,136.27 D2.A 219.46,135.25 219.46,130.68 K1.1 220.6,125.73 222.25,124.08 231.27,124.08 R85.1
N$101
  Bottom 1.676: C61.1 154.81,161.8 157.86,161.8 | 157.86,161.8 X4.3 163.96,161.8 166.62,161.8 | 157.86,156.72 D4.C 157.86,161.8
N$102
  Bottom 1.676: IC8.OUT 138.43,155.83 146.69,155.83 | 146.69,155.83 C61.2 | C62.+ 146.69,155.83
N$103
  Bottom 1.676: Q10.C 216.61,152.83 | 216.61,152.83 R82.1 | R81.1 218.5,156.4 | 218.5,156.4 216.61,154.51 216.61,152.83 | D5.C 219.71,156.08 219.39,156.4 218.5,156.4
N$104
  Bottom 1.676: R83.1 219.67,145.41 215.26,145.41 215.15,145.41 213.11,147.45 213.11,153.29 Q10.B 213.11,159.64 R84.1
N$105
  Bottom 1.676: R50.1 118.36,157.23 | 118.36,157.23 117.22,156.08 117.22,148.21 119.25,146.18 124.59,146.18 127.25,143.51 142.11,143.51 142.62,143 145.29,143 147.95,140.33 191.52,140.33 192.91,141.73 207.14,141.73 207.26,141.61 | 207.26,141.61 211.71,137.16 | 211.71,137.16 212.6,136.27 212.6,133.22 | 212.6,133.22 212.6,121.16 214.76,118.87 R51.1 | 213.87,133.22 R80.2 212.6,133.22 | IC8.IN 132.84,155.32 121.03,155.32 | 121.03,155.32 119.13,157.23 118.36,157.23 | C63.+ 124.71,155.07 124.71,155.19 124.46,155.45 121.16,155.45 121.03,155.32 | R82.2 208.97,141.48 207.64,141.48 207.52,141.61 207.26,141.61 | R83.2 211.71,137.25 211.71,137.16
N$106
  Bottom 1.676: R86.1 230.89,106.68 232.03,107.82 R85.2
N$107
  Bottom 1.676: R86.2 219.58,103 219.58,101.47 1.1
N$102000
  Bottom 1.676: 175.26,166.62 175.26,166.24 176.91,164.59
N$667410
  Bottom 1.676: 209.55,142.49 209.68,142.49 213.49,138.68 211.71,138.68 209.8,140.59
(copper drawn outside any net)
  shapes: Bottom area x635, Bottom circle x149

## Text on the board
Bottom: BEN PROVENZANO III | FILTER MODULE | PROTOTYPE V.B1